# Altium PCB DRAM_TEMP_AD.pcbdoc (part 2 of 2)
Units mil, origin at the board's own origin, x right, y up, seen from the top; angles counter-clockwise.
Board outline 1637.1 x 1239.26 mil, 2 copper layers (Top Layer, Bottom Layer); 88 components, 167 nets, 455 pads, 173 vias.
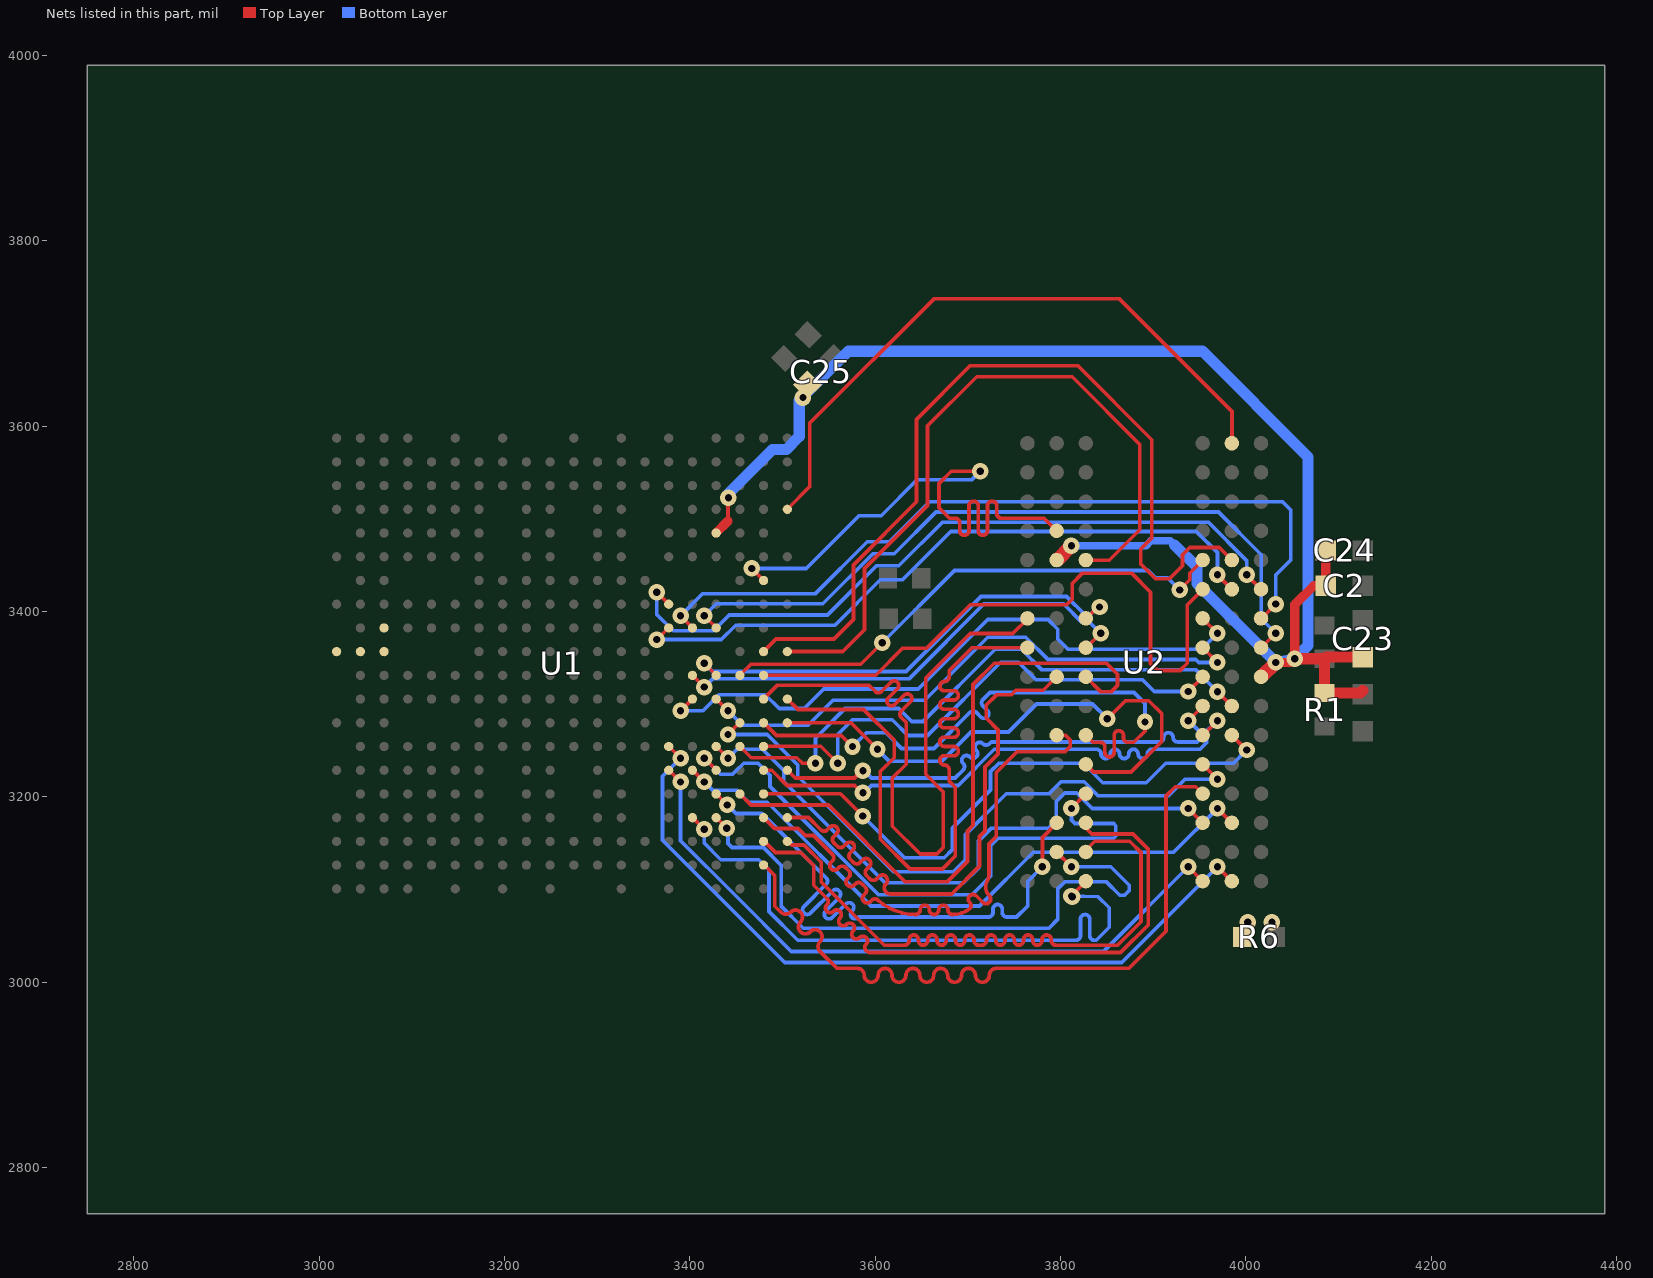
[diagram p2: the nets of this part, all layers, seen from the top]

## Via types
v1: diameter 17.72, hole 7.87, Top Layer to Bottom Layer, 140 vias
v2: diameter 17.7, hole 7.9, Top Layer to Bottom Layer, 29 vias
v3: diameter 18, hole 8, Top Layer to Bottom Layer, 4 vias

## Nets (pads, with @x,y where several pads share a name; then routed paths per layer and width w, separated by ;. In a path a pad name is that pad's centre, name@x,y a point inside that pad or via, vN(x,y) a via of type N, cw(c..) or ccw(c..) an arc to the next point about the centre after c; other vN are vias at no path point) (continued)
SA15: U1.Y11 U2.M7 | length 786
  Top Layer w4: U1.Y11@3505.22,3356.86 3565.14,3356.86 3588.54,3380.26 3588.54,3446.26 3656.54,3514.26 3656.54,3600.26 3709.54,3653.26 3812.54,3653.26 3885.54,3580.26 3885.54,3488.26 3852.52,3455.24 U2.M7@3827.54,3455.24
SBA0: U1.W11 U2.M2 | length 937.4
  Top Layer w4: U1.W11@3479.63,3356.86 3493.03,3370.26 3555.54,3370.26 3576.54,3391.26 3576.54,3450.26 3644.54,3518.26 3644.54,3607.26 3702.54,3665.26 3818.54,3665.26 3898.54,3585.26 3898.54,3479.26 3886.54,3467.26 3886.54,3451.26 3902.54,3435.26 3917.54,3435.26 3931.54,3449.26 3931.54,3461.26 3939.4,3469.11 3971.15,3469.11 U2.M2@3985.02,3455.24
SBA1: U1.W14 U2.N8 | length 647.9
  Top Layer w4: v1(3466.84,3446.42) U1.W14@3479.63,3433.63 ; v1(3713.54,3551.26) 3682.06,3551.26 3668.8,3538 3668.8,3512 3680.2,3500.6 3686.22,3500.6 cw(c3686.22,3495.6) 3691.22,3495.6 3691.22,3487.2 ccw(c3696.22,3487.2) 3696.22,3482.2 ccw(c3696.22,3487.2) 3701.22,3487.2 3701.22,3514 cw(c3706.22,3514) 3706.22,3519 cw(c3706.22,3514) 3711.22,3514 3711.22,3487.2 ccw(c3716.22,3487.2) 3716.22,3482.2 ccw(c3716.22,3487.2) 3721.22,3487.2 3721.22,3514 cw(c3726.22,3514) 3726.22,3519 cw(c3726.22,3514) 3731.22,3514 3731.22,3505.6 ccw(c3736.22,3505.6) 3736.22,3500.6 3782.17,3500.6 U2.N8@3796.04,3486.73
  Bottom Layer w4: v1(3466.84,3446.42) 3525.71,3446.42 3582.54,3503.26 3606.54,3503.26 3645.54,3542.26 3704.54,3542.26 v1(3713.54,3551.26)
SBA2: U1.V10 U2.M3 | length 572.3
  Top Layer w4: U1.V10@3454.04,3331.26 3465.95,3343.16 3584.45,3343.16 v1(3607.54,3366.26) ; v1(3928.54,3423.26) 3939.54,3434.26 3939.54,3441.26 U2.M3@3953.52,3455.24
  Bottom Layer w4: v1(3607.54,3366.26) 3685.54,3444.26 3894.54,3444.26 3902.54,3436.26 3915.54,3436.26 v1(3928.54,3423.26)
SCAS: U1.T9 U2.K3 | length 699.4
  Top Layer w4: v1(3390.07,3292.87) U1.T9@3402.86,3305.67 ; U2.K3@3953.52,3392.24 v1(3969.27,3376.49)
  Bottom Layer w4: v1(3390.07,3292.87) 3414.16,3292.87 3431.54,3310.26 3481.54,3310.26 3496.54,3295.26 3523.54,3295.26 3544.54,3316.26 3646.54,3316.26 3721.54,3391.26 3774.04,3391.26 3774.14,3391.35 3786.45,3391.35 3796.93,3380.87 3796.93,3370.33 3808.01,3359.26 3952.04,3359.26 v1(3969.27,3376.49)
SCKE0: U1.W9 U2.K9 | length 771.4
  Top Layer w4: U1.W9@3479.63,3305.67 3494.22,3320.26 3593.54,3320.26 3599.99,3313.81 ccw(c3603.52,3317.35) 3607.06,3313.81 3616.99,3323.74 cw(c3620.52,3320.21) 3624.06,3323.74 cw(c3620.52,3320.21) 3624.06,3316.67 3614.13,3306.74 ccw(c3617.67,3303.21) 3614.13,3299.67 ccw(c3617.67,3303.21) 3621.2,3299.67 3631.13,3309.6 cw(c3634.67,3306.06) 3638.2,3309.6 cw(c3634.67,3306.06) 3638.2,3302.53 3628.27,3292.6 ccw(c3631.81,3289.06) 3628.27,3285.53 3633.54,3280.26 3633.54,3235.26 3618.54,3220.26 3618.54,3168.26 3648.54,3138.26 3666.54,3138.26 3673.54,3145.26 3673.54,3205.26 3654.54,3224.26 3654.54,3328.26 3702.54,3376.26 3748.57,3376.26 U2.K9@3764.55,3392.24
SCKE1: U1.Y9 U2.J9 | length 781.8
  Top Layer w4: U1.Y9@3505.22,3305.67 3516.63,3294.26 3587.54,3294.26 3620.54,3261.26 3620.54,3242.26 3605.54,3227.26 3605.54,3154.26 3637.54,3122.26 3672.54,3122.26 3686.54,3136.26 3686.54,3210.26 3679.8,3217 3679.8,3229.39 ccw(c3674.8,3229.39) 3674.8,3234.39 cw(c3674.8,3239.39) 3669.8,3239.39 cw(c3674.8,3239.39) 3674.8,3244.39 3684.8,3244.39 ccw(c3684.8,3249.39) 3689.8,3249.39 ccw(c3684.8,3249.39) 3684.8,3254.39 3674.8,3254.39 cw(c3674.8,3259.39) 3669.8,3259.39 cw(c3674.8,3259.39) 3674.8,3264.39 3684.8,3264.39 ccw(c3684.8,3269.39) 3689.8,3269.39 ccw(c3684.8,3269.39) 3684.8,3274.39 3674.8,3274.39 cw(c3674.8,3279.39) 3669.8,3279.39 cw(c3674.8,3279.39) 3674.8,3284.39 3684.8,3284.39 ccw(c3684.8,3289.39) 3689.8,3289.39 ccw(c3684.8,3289.39) 3684.8,3294.39 3674.8,3294.39 cw(c3674.8,3299.39) 3669.8,3299.39 cw(c3674.8,3299.39) 3674.8,3304.39 3684.8,3304.39 ccw(c3684.8,3309.39) 3689.8,3309.39 ccw(c3684.8,3309.39) 3684.8,3314.39 3674.8,3314.39 cw(c3674.8,3319.39) 3669.8,3319.39 cw(c3674.8,3319.39) 3674.8,3324.39 ccw(c3674.8,3329.39) 3679.8,3329.39 3679.8,3336 3704.8,3361 3724.78,3361 3725.03,3360.75 U2.J9@3764.55,3360.75
SCKN: U1.U10 U2.K7 | length 997.5
  Top Layer w4: v1(3415.66,3344.05) U1.U10@3428.45,3331.26 ; U2.K7@3827.54,3392.24 3839.1,3403.8 3841.1,3403.8 v1(3842.1,3404.8)
  Mid-Layer 1 w4: v1(3842.1,3404.8) 3851.1,3395.8 3886.1,3395.8 3904.1,3377.8 3904.1,3309.8 3915.1,3298.8 3915.1,3119.8 3936.1,3098.8 4007.1,3098.8 4018.1,3087.8 4018.1,3079.8 4028.1,3069.8 v2(4028.1,3064.8)
  Bottom Layer w4: v1@3415.76,3344.05 v1(3415.66,3344.05) 3424.56,3335.26 3633.23,3335.26 3714.23,3416.26 3806.54,3416.26 3826.56,3396.24 3831.54,3396.24 3839.1,3403.8 v1@3847.48,3403.8
SCKP: R6.1 U1.T10 U2.J7 | length 982
  Top Layer w4: U1.T10@3402.86,3331.26 v1(3415.66,3318.46) ; U2.J7@3827.54,3360.75 v1(3843.29,3376.49)
  Mid-Layer 1 w4: v1(3843.29,3376.49) 3854.59,3387.8 3882.1,3387.8 3896.1,3373.8 3896.1,3305.8 3907.1,3294.8 3907.1,3114.8 3931.1,3090.8 4002.1,3090.8 4009.1,3083.8 4009.1,3078.8 4002.1,3071.8 v2(4002.1,3064.8)
  Bottom Layer w4: v1@3415.76,3318.46 v1(3415.66,3318.46) 3424.56,3327.26 3636.54,3327.26 3717.54,3408.26 3803.23,3408.26 3823.24,3388.24 3831.54,3388.24 v1(3843.29,3376.49)
SCS0: U1.R12 U2.L2 | length 726.9
  Top Layer w4: v1(3364.48,3369.65) U1.R12@3377.27,3382.45 ; v1(3969.27,3439.48) U2.L2@3985.02,3423.74
  Bottom Layer w4: v1(3364.48,3369.65) 3433.94,3369.65 3449.54,3385.26 3556.54,3385.26 3605.54,3434.26 3629.54,3434.26 3681.54,3486.26 3946.54,3486.26 3969.27,3463.52 v1(3969.27,3439.48)
SCS1: U1.R13 U2.L1 | length 789
  Top Layer w4: v1(3364.48,3420.83) U1.R13@3377.27,3408.04 ; v1(4000.76,3439.49) U2.L1@4016.51,3423.74
  Bottom Layer w4: v1(3364.48,3420.83) 3364.48,3396.83 3382.05,3379.26 3425.54,3379.26 3442.54,3396.26 3548.54,3396.26 3601.54,3449.26 3625.54,3449.26 3672.54,3496.26 3959.54,3496.26 4000.76,3455.03 v1(4000.76,3439.49)
SDC1_CLK: 
SDC1_CMD: 
SDC1_D0: 
SDC1_D1: 
SDC1_D2: 
SDC1_D3: 
SDQ0: U1.W7 U2.H3 | length 578.3
  Top Layer w4: U1.W7@3479.63,3254.49 3541.31,3254.49 v1(3559.54,3236.26) ; v1(3937.64,3313.63) U2.H3@3953.39,3329.38
  Bottom Layer w4: v1(3559.54,3236.26) 3559.54,3267.26 3575.54,3283.26 3618.54,3283.26 3635.54,3266.26 3656.54,3266.26 3735.54,3345.26 3754.54,3345.26 3773.54,3326.26 3888.54,3326.26 3901.17,3313.63 v1(3937.64,3313.63)
SDQ1: U1.V7 U2.G2 | length 642.4
  Top Layer w4: U1.V7@3454.04,3254.49 3466.27,3242.26 3515.54,3242.26 3521.54,3236.26 v1(3535.54,3236.26) ; v1(3969.27,3313.51) U2.G2@3985.02,3297.76
  Bottom Layer w4: v1(3535.54,3236.26) 3535.54,3263.26 3567.54,3295.26 3625.54,3295.26 3639.54,3281.26 3651.54,3281.26 3729.54,3359.26 3757.54,3359.26 3779.54,3337.26 3945.52,3337.26 v1(3969.27,3313.51)
SDQ2: U1.W8 U2.F7 | length 635.8
  Top Layer w4: U1.W8@3479.63,3280.08 3493.45,3266.26 3563.54,3266.26 v1(3575.54,3254.26) ; U2.F7@3827.3,3266.5 3835,3258.8 3842.85,3258.8 cw(c3842.85,3253.8) 3847.85,3253.8 3847.85,3248 ccw(c3852.85,3248) 3852.85,3243 ccw(c3852.85,3248) 3857.85,3248 3857.85,3266.32 cw(c3862.85,3266.32) 3862.85,3271.32 cw(c3862.85,3266.32) 3867.85,3266.32 3867.85,3263.8 ccw(c3872.85,3263.8) 3872.85,3258.8 3879.1,3258.8 3891.1,3270.8 v1(3891.1,3280.8)
  Bottom Layer w4: v1(3575.54,3254.26) 3590.54,3269.26 3611.54,3269.26 3628.54,3252.26 3663.54,3252.26 3702.17,3290.89 cw(c3705.71,3287.35) 3709.24,3290.89 3713.97,3286.16 ccw(c3717.51,3289.7) 3721.04,3286.16 ccw(c3717.51,3289.7) 3721.04,3293.24 3716.32,3297.96 cw(c3719.85,3301.5) 3716.32,3305.03 3723.9,3312.62 3879.29,3312.62 3891.1,3300.8 v1(3891.1,3280.8)
  other v1: 3575.54,3254.26 3575.54,3254.26
SDQ3: U1.V8 U2.E3 | length 706.3
  Top Layer w4: v1(3441.25,3267.28) U1.V8@3454.04,3280.08 ; U2.E3@3953.52,3234.76 v1(3969.27,3219.01)
  Bottom Layer w4: v1(3441.25,3267.28) 3483.52,3267.28 3516.54,3234.26 3516.54,3222.26 3619.54,3119.26 3684.54,3119.26 3697.54,3132.26 3697.54,3159.26 3741.54,3203.26 3787.54,3203.26 3800.54,3216.26 3825.54,3216.26 3840.54,3201.26 3916.54,3201.26 3934.29,3219.01 v1(3969.27,3219.01)
SDQ4: U1.W4 U2.F8 | length 636.3
  Top Layer w4: U1.W4@3479.63,3177.72 3491.54,3165.81 3516.99,3165.81 3524.54,3158.26 3533.54,3158.26 3553.87,3137.93 cw(c3550.33,3134.39) 3553.87,3130.86 3552.44,3129.43 ccw(c3555.98,3125.9) 3552.44,3122.36 ccw(c3555.98,3125.9) 3559.51,3122.36 3560.94,3123.79 cw(c3564.47,3120.25) 3568.01,3123.79 3571.55,3120.25 cw(c3568.01,3116.72) 3571.55,3113.18 3570.12,3111.75 ccw(c3573.65,3108.22) 3570.12,3104.68 ccw(c3573.65,3108.22) 3577.19,3104.68 3578.62,3106.11 cw(c3582.15,3102.57) 3585.69,3106.11 3589.22,3102.57 cw(c3585.69,3099.04) 3589.22,3095.5 3587.8,3094.08 ccw(c3591.33,3090.54) 3587.8,3087 ccw(c3591.33,3090.54) 3594.87,3087 3596.29,3088.43 cw(c3599.83,3084.9) 3603.37,3088.43 ccw(c3643.51,3132.92) 3643.51,3073 ccw(c3643.51,3078) 3648.51,3078 cw(c3653.51,3078) 3653.51,3083 cw(c3653.51,3078) 3658.51,3078 ccw(c3663.51,3078) 3663.51,3073 ccw(c3663.51,3078) 3668.51,3078 cw(c3673.51,3078) 3673.51,3083 cw(c3673.51,3078) 3678.51,3078 ccw(c3683.51,3078) 3683.51,3073 ccw(c3683.51,3103.75) 3701.93,3079.13 ccw(c3698.39,3082.66) 3701.93,3086.2 cw(c3705.46,3089.74) 3701.93,3093.27 cw(c3705.46,3089.74) 3709,3093.27 3716.07,3086.2 ccw(c3719.61,3089.74) 3723.14,3086.2 ccw(c3719.61,3089.74) 3723.14,3093.27 cw(c3732.59,3102.72) 3720.8,3109 ccw(c3705.79,3117) 3722.8,3117 3722.8,3149.52 3730.54,3157.26 3730.54,3226.26 3752.92,3248.63 3804.92,3248.63 3810.54,3254.26 3810.54,3261.26 3805.3,3266.5 U2.F8@3795.8,3266.5
SDQ5: U1.Y4 U2.H8 | length 604.4
  Top Layer w4: U1.Y4@3505.22,3177.72 3528.08,3177.72 3541.35,3164.45 ccw(c3544.88,3167.99) 3548.42,3164.45 3551.35,3167.38 cw(c3554.88,3163.85) 3558.42,3167.38 cw(c3554.88,3163.85) 3558.42,3160.31 3555.49,3157.38 ccw(c3559.03,3153.85) 3555.49,3150.31 3559.03,3146.77 ccw(c3562.56,3150.31) 3566.1,3146.77 3569.03,3149.7 cw(c3572.56,3146.17) 3576.1,3149.7 cw(c3572.56,3146.17) 3576.1,3142.63 3573.17,3139.7 ccw(c3576.7,3136.17) 3573.17,3132.63 3576.7,3129.1 ccw(c3580.24,3132.63) 3583.77,3129.1 3586.7,3132.03 cw(c3590.24,3128.49) 3593.77,3132.03 cw(c3590.24,3128.49) 3593.77,3124.95 3590.85,3122.03 ccw(c3594.38,3118.49) 3590.85,3114.95 3594.38,3111.42 ccw(c3597.92,3114.95) 3601.45,3111.42 3604.38,3114.35 cw(c3607.92,3110.81) 3611.45,3114.35 cw(c3607.09,3109.98) 3611.8,3106 ccw(c3614.97,3101.83) 3609.8,3101 ccw(c3616.54,3102.09) 3616.54,3095.26 3682.54,3095.26 3712.54,3125.26 3712.54,3157.26 3718.54,3163.26 3718.54,3232.26 3732.54,3246.26 3732.54,3272.26 3719.8,3285 3719.8,3299 3730.8,3310 3746.8,3310 3751.8,3315 3781.3,3315 U2.H8@3795.8,3329.5
SDQ6: U1.V5 U2.H7 | length 713.7
  Top Layer w4: U1.V5@3454.04,3203.31 3466.09,3191.26 3549.54,3191.26 3632.54,3108.26 3677.54,3108.26 3699.54,3130.26 3699.54,3163.26 3705.54,3169.26 3705.54,3321.26 3728.39,3344.11 3849.69,3344.11 3861.54,3332.26 3861.54,3320.26 3854.54,3313.26 3843.53,3313.26 U2.H7@3827.3,3329.5
SDQ7: U1.W5 U2.F2 | length 662.7
  Top Layer w4: U1.W5@3479.63,3203.31 3562.49,3203.31 v1(3586.54,3179.26) ; U2.F2@3985.02,3266.26 v1(4000.77,3250.51)
  Bottom Layer w4: v1(3586.54,3179.26) 3631.54,3134.26 3674.54,3134.26 3683.54,3143.26 3683.54,3166.26 3724.54,3207.26 3724.54,3227.26 3733.54,3236.26 3824.54,3236.26 3845.54,3215.26 3892.54,3215.26 3913.54,3236.26 3986.52,3236.26 v1(4000.77,3250.51)
SDQ8: U1.U4 U2.B8 | length 677
  Top Layer w4: U1.U4@3428.45,3177.72 3439.8,3166.37 v1(3439.8,3166) ; U2.B8@3795.8,3140.5 v1(3811.79,3124.53)
  Bottom Layer w4: v1(3439.8,3166) 3441.25,3164.55 3441.25,3149.55 3445.54,3145.26 3479.54,3145.26 3498.54,3126.26 3498.54,3082.26 3522.54,3058.26 3787.54,3058.26 3796.86,3067.58 3796.86,3100.58 3804.54,3108.26 3849.54,3108.26 3864,3093.8 3869.08,3093.8 3874.1,3098.82 3874.1,3104.69 3854.27,3124.53 v1(3811.79,3124.53)
SDQ9: U1.U7 U2.C3 | length 683.9
  Top Layer w4: U1.U7@3428.45,3254.49 v1(3441.25,3241.69) ; v1(3937.77,3187.51) U2.C3@3953.52,3171.77
  Bottom Layer w4: v1(3441.25,3241.69) 3450.81,3251.26 3478.54,3251.26 3501.54,3228.26 3501.54,3216.26 3610.54,3107.26 3695.54,3107.26 3711.54,3123.26 3711.54,3152.26 3725.54,3166.26 3787.54,3166.26 3795.54,3174.26 3795.54,3195.26 3804.54,3204.26 3817.54,3204.26 3834.28,3187.51 v1(3937.77,3187.51)
SDQ10: U1.U5 U2.C8 | length 660.2
  Top Layer w4: U1.U5@3428.45,3203.31 v1(3440.45,3191.31) ; v1@3780.54,3125.26 3780.54,3156.27 U2.C8@3796.04,3171.77
  Bottom Layer w4: v1(3440.45,3191.31) 3449.76,3182 3477.8,3182 3547.12,3112.68 cw(c3543.58,3109.15) 3547.12,3105.61 3523.19,3081.68 ccw(c3526.72,3078.15) 3523.19,3074.61 ccw(c3526.72,3078.15) 3530.26,3074.61 3554.19,3098.54 cw(c3557.72,3095.01) 3561.26,3098.54 cw(c3557.72,3095.01) 3561.26,3091.47 3546.65,3076.86 ccw(c3550.19,3073.33) 3546.65,3069.79 ccw(c3550.19,3073.33) 3553.72,3069.79 3568.33,3084.4 cw(c3571.87,3080.86) 3575.4,3084.4 cw(c3571.87,3080.86) 3575.4,3077.33 3574.94,3076.86 ccw(c3578.47,3073.33) 3574.94,3069.79 ccw(c3578.47,3073.33) 3582.01,3069.79 3582.47,3070.26 3722.14,3070.26 ccw(c3722.14,3075.26) 3727.14,3075.26 3727.14,3078.83 cw(c3732.14,3078.83) 3732.14,3083.83 cw(c3732.14,3078.83) 3737.14,3078.83 3737.14,3075.26 ccw(c3742.14,3075.26) 3742.14,3070.26 3752.54,3070.26 3764.54,3082.26 3764.54,3108.78 v1(3780.29,3124.53)
  other v1: 3440.45,3191.31 3440.45,3191.31
SDQ11: U1.T6 U2.C2 | length 693
  Top Layer w4: U1.T6@3402.86,3228.9 v1(3415.66,3216.1) ; v1(3969.27,3187.51) U2.C2@3985.02,3171.77
  Bottom Layer w4: v1(3415.66,3216.1) 3424.51,3207.26 3450.54,3207.26 3463.54,3194.26 3483.54,3194.26 3595.54,3082.26 3712.54,3082.26 3770.54,3140.26 3922.01,3140.26 v1(3969.27,3187.51)
SDQ12: U1.U6 U2.D7 | length 682
  Top Layer w4: v1(3415.66,3241.69) U1.U6@3428.45,3228.9 ; v1(3811.79,3187.52) U2.D7@3827.3,3203.5
  Bottom Layer w4: v1(3415.66,3241.69) 3433.09,3224.26 3446.18,3224.26 3458.18,3236.26 3473.54,3236.26 3486.54,3223.26 3486.54,3211.26 3603.54,3094.26 3704.54,3094.26 3724.54,3114.26 3724.54,3147.26 3732.54,3155.26 3857.2,3155.26 3859.54,3157.6 3859.54,3168.91 3857.2,3171.26 3815.54,3171.26 3811.79,3175 v1(3811.79,3187.52)
SDQ13: U1.R7 U2.A2 | length 833
  Top Layer w4: U1.R7@3377.27,3254.49 v1(3390.07,3241.69) ; v1(3969.27,3124.52) U2.A2@3985.02,3108.78
  Bottom Layer w4: v1(3390.07,3241.69) 3370.68,3222.31 3370.68,3153.12 3502.54,3021.26 3866,3021.26 v1(3969.27,3124.52)
SDQ14: U1.T4 U2.A7 | length 681.3
  Top Layer w4: U1.T4@3402.86,3177.72 v1(3415.66,3164.92) ; v1(3811.79,3093.03) U2.A7@3827.3,3109
  Bottom Layer w4: v1(3415.66,3164.92) 3415.66,3150.14 3433.54,3132.26 3474.54,3132.26 3485.54,3121.26 3485.54,3076.26 3516.54,3045.26 3816.53,3045.26 ccw(c3816.53,3050.26) 3821.53,3050.26 3821.53,3068 cw(c3826.53,3068) 3826.53,3073 cw(c3826.53,3068) 3831.53,3068 3831.53,3050.26 ccw(c3836.53,3050.26) 3836.53,3045.26 3838.54,3045.26 3852.54,3059.26 3852.54,3080.26 3840.54,3092.26 v1(3811.79,3093.03)
  other v1: 3812.54,3092.26
SDQ15: U1.R6 U2.A3 | length 738.7
  Top Layer w4: U1.R6@3377.27,3228.9 v1(3390.07,3216.1) ; v1(3937.77,3124.53) U2.A3@3953.52,3108.78
  Bottom Layer w4: v1(3390.07,3216.1) 3390.07,3152.73 3448.54,3094.26 3509.54,3033.26 3846.5,3033.26 v1(3937.77,3124.53)
SDQM0: U1.Y8 U2.E7 | length 596.3
  Top Layer w4: U1.Y8@3505.22,3280.08 3573.72,3280.08 v1(3602.54,3251.26) ; U2.E7@3827.3,3235 3835.5,3226.8 3876.1,3226.8 3909.1,3259.8 3909.1,3289.8 3895.1,3303.8 3870.08,3303.8 v1(3850.54,3284.26)
  Bottom Layer w4: v1(3602.54,3251.26) 3615.54,3238.26 3671.54,3238.26 3703.28,3270 3743.8,3270 3774.06,3300.26 3834.54,3300.26 v1(3850.54,3284.26)
SDQM1: U1.W2 U2.D3 | length 829.4
  Top Layer w4: U1.W2@3479.45,3127.35 3491.8,3115 3491.8,3082 3498.16,3075.64 ccw(c3503.47,3080.94) 3508.77,3075.64 cw(c3514.07,3070.33) 3519.38,3075.64 cw(c3514.07,3070.33) 3519.38,3065.03 ccw(c3524.68,3059.73) 3519.38,3054.42 ccw(c3524.68,3059.73) 3529.98,3054.42 cw(c3535.29,3049.12) 3540.59,3054.42 cw(c3535.29,3049.12) 3540.59,3043.82 ccw(c3545.89,3038.51) 3540.59,3033.21 3558.8,3015 3580.69,3015 cw(c3580.69,3007.5) 3588.19,3007.5 ccw(c3595.69,3007.5) 3595.69,3000 ccw(c3595.69,3007.5) 3603.19,3007.5 cw(c3610.69,3007.5) 3610.69,3015 cw(c3610.69,3007.5) 3618.19,3007.5 ccw(c3625.69,3007.5) 3625.69,3000 ccw(c3625.69,3007.5) 3633.19,3007.5 cw(c3640.69,3007.5) 3640.69,3015 cw(c3640.69,3007.5) 3648.19,3007.5 ccw(c3655.69,3007.5) 3655.69,3000 ccw(c3655.69,3007.5) 3663.19,3007.5 cw(c3670.69,3007.5) 3670.69,3015 cw(c3670.69,3007.5) 3678.19,3007.5 ccw(c3685.69,3007.5) 3685.69,3000 ccw(c3685.69,3007.5) 3693.19,3007.5 cw(c3700.69,3007.5) 3700.69,3015 cw(c3700.69,3007.5) 3708.19,3007.5 ccw(c3715.69,3007.5) 3715.69,3000 ccw(c3715.69,3007.5) 3723.19,3007.5 cw(c3730.69,3007.5) 3730.69,3015 3873.8,3015 3913.8,3055 3913.8,3201 3923.8,3211 3945.8,3211 U2.D3@3953.3,3203.5
SDQS0N: U1.Y6 U2.G3 | length 553.7
  Top Layer w4: U1.Y6@3505.22,3228.9 3513.86,3220.26 3577.63,3220.26 3585.48,3228.1 v1(3586.83,3228.1) ; v1(3937.77,3282.01) U2.G3@3953.52,3297.76
  Bottom Layer w4: v1(3586.83,3228.1) 3588.19,3228.1 3596.04,3220.26 3686.23,3220.26 3694.99,3229.02 ccw(c3691.46,3232.56) 3694.99,3236.09 cw(c3698.53,3239.63) 3694.99,3243.16 cw(c3698.53,3239.63) 3702.06,3243.16 ccw(c3705.6,3246.7) 3709.13,3243.16 ccw(c3705.6,3246.7) 3709.13,3250.23 cw(c3712.67,3253.77) 3709.13,3257.31 cw(c3712.67,3253.77) 3716.2,3257.31 ccw(c3719.74,3260.84) 3723.28,3257.31 3725.23,3259.26 3906.4,3259.26 ccw(c3906.4,3264.26) 3911.4,3264.26 cw(c3916.4,3264.26) 3916.4,3269.26 cw(c3916.4,3264.26) 3921.4,3264.26 ccw(c3926.4,3264.26) 3926.4,3259.26 3947.18,3259.26 3949.52,3261.6 3949.52,3270.95 3938.46,3282.01 v1(3937.77,3282.01)
  other v1: 3937.77,3282.01
SDQS0P: U1.W6 U2.F3 | length 597.2
  Top Layer w4: U1.W6@3479.72,3228.77 3488.47,3228.77 3504.98,3212.26 3577.63,3212.26 v1(3586.83,3204.41) v1@3585.48,3204.41 ; U2.F3@3953.52,3266.26 v1(3969.27,3282)
  Bottom Layer w4: v1(3586.83,3204.41) 3588.19,3204.41 3596.04,3212.26 3689.54,3212.26 3728.54,3251.26 3838.72,3251.26 cw(c3838.72,3246.26) 3843.72,3246.26 ccw(c3848.72,3246.26) 3848.72,3241.26 ccw(c3848.72,3246.26) 3853.72,3246.26 cw(c3858.72,3246.26) 3858.72,3251.26 cw(c3858.72,3246.26) 3863.72,3246.26 ccw(c3868.72,3246.26) 3868.72,3241.26 ccw(c3868.72,3246.26) 3873.72,3246.26 cw(c3878.72,3246.26) 3878.72,3251.26 cw(c3878.72,3246.26) 3883.72,3246.26 ccw(c3888.72,3246.26) 3888.72,3241.26 ccw(c3888.72,3246.26) 3893.72,3246.26 cw(c3898.72,3246.26) 3898.72,3251.26 3950.49,3251.26 3957.52,3258.29 3957.52,3270.95 v1(3969.27,3282) v1@3968.58,3282
  other v1: 3586.83,3204.41
SDQS1N: U1.Y3 U2.B7 | length 703.9
  Top Layer w4: U1.Y3@3505.04,3152.94 3509.98,3148 3523.11,3148 3541.8,3129.31 3541.8,3108 3609.8,3040 3631.66,3040 ccw(c3631.66,3045) 3636.66,3045 3636.66,3046 cw(c3641.66,3046) 3641.66,3051 cw(c3641.66,3046) 3646.66,3046 3646.66,3045 ccw(c3651.66,3045) 3651.66,3040 ccw(c3651.66,3045) 3656.66,3045 3656.66,3046 cw(c3661.66,3046) 3661.66,3051 cw(c3661.66,3046) 3666.66,3046 3666.66,3045 ccw(c3671.66,3045) 3671.66,3040 ccw(c3671.66,3045) 3676.66,3045 3676.66,3046 cw(c3681.66,3046) 3681.66,3051 cw(c3681.66,3046) 3686.66,3046 3686.66,3045 ccw(c3691.66,3045) 3691.66,3040 ccw(c3691.66,3045) 3696.66,3045 3696.66,3046 cw(c3701.66,3046) 3701.66,3051 cw(c3701.66,3046) 3706.66,3046 3706.66,3045 ccw(c3711.66,3045) 3711.66,3040 3715.03,3040 ccw(c3715.03,3045) 3720.03,3045 3720.03,3046 cw(c3725.03,3046) 3725.03,3051 cw(c3725.03,3046) 3730.03,3046 3730.03,3045 ccw(c3735.03,3045) 3735.03,3040 ccw(c3735.03,3045) 3740.03,3045 3740.03,3046 cw(c3745.03,3046) 3745.03,3051 cw(c3745.03,3046) 3750.03,3046 3750.03,3045 ccw(c3755.03,3045) 3755.03,3040 ccw(c3755.03,3045) 3760.03,3045 3760.03,3046 cw(c3765.03,3046) 3765.03,3051 cw(c3765.03,3046) 3770.03,3046 3770.03,3045 ccw(c3775.03,3045) 3775.03,3040 ccw(c3775.03,3045) 3780.03,3045 3780.03,3046 cw(c3785.03,3046) 3785.03,3051 cw(c3785.03,3046) 3790.03,3046 3790.03,3045 ccw(c3795.03,3045) 3795.03,3040 3861.49,3040 3886.8,3065.31 3886.8,3140 3874.8,3152 3836.8,3152 3827.3,3142.5 U2.B7@3827.3,3140.5
SDQS1P: U1.W3 U2.C7 | length 698.1
  Top Layer w4: U1.W3@3479.45,3152.94 3492.39,3140 3519.8,3140 3533.8,3126 3533.8,3104.69 3547.9,3090.59 cw(c3544.36,3087.05) 3547.9,3083.52 ccw(c3551.43,3079.98) 3547.9,3076.45 ccw(c3551.43,3079.98) 3554.97,3076.45 cw(c3558.5,3072.91) 3562.04,3076.45 cw(c3558.5,3072.91) 3562.04,3069.38 ccw(c3565.57,3065.84) 3562.04,3062.31 ccw(c3565.57,3065.84) 3569.11,3062.31 cw(c3572.64,3058.77) 3576.18,3062.31 cw(c3572.64,3058.77) 3576.18,3055.24 ccw(c3579.72,3051.7) 3576.18,3048.16 ccw(c3579.72,3051.7) 3583.25,3048.16 cw(c3586.79,3044.63) 3590.32,3048.16 cw(c3586.79,3044.63) 3590.32,3041.09 ccw(c3593.86,3037.56) 3590.32,3034.02 ccw(c3595.24,3038.94) 3594.8,3032 3864.8,3032 3894.8,3062 3894.8,3143.31 3878.11,3160 3833.8,3160 3827.3,3166.5 U2.C7@3827.3,3172
SODT0: U1.T12 U2.K1 | length 861.5
  Top Layer w4: v1(3390.07,3395.24) U1.T12@3402.86,3382.45 ; U2.K1@4016.51,3392.24 v1(4032.26,3407.98)
  Bottom Layer w4: v1(3390.07,3395.24) 3414.08,3419.26 3535.54,3419.26 3591.54,3475.26 3615.54,3475.26 3658.54,3518.26 4039.54,3518.26 4048.54,3509.26 4048.54,3455.74 4032.26,3439.46 v1(4032.26,3407.98)
SODT1: U1.U12 U2.J1 | length 798
  Top Layer w4: v1(3415.66,3395.24) U1.U12@3428.45,3382.45 ; U2.J1@4016.51,3360.75 v1(4032.26,3376.49)
  Bottom Layer w4: v1(3415.66,3395.24) 3428.67,3408.26 3543.54,3408.26 3597.54,3462.26 3620.54,3462.26 3665.54,3507.26 3970.54,3507.26 4016.54,3461.26 4016.54,3392.21 v1(4032.26,3376.49)
SRAS: U1.U9 U2.J3 | length 625.5
  Top Layer w4: U1.U9@3428.45,3305.67 v1(3441.25,3292.87) ; U2.J3@3953.52,3360.75 v1(3969.27,3345)
  Bottom Layer w4: v1(3441.25,3292.87) 3456.86,3277.26 3527.54,3277.26 3554.54,3304.26 3653.54,3304.26 3721.54,3372.26 3762.54,3372.26 3786.54,3348.26 3945.83,3348.26 3949.09,3345 v1(3969.27,3345)
SRST: U1.Y17 U2.T2 | length 698.8
  Top Layer w4: U1.Y17@3505.22,3510.4 3529.54,3534.72 3529.54,3603.26 3663.54,3737.26 3863.54,3737.26 3985.02,3615.78 U2.T2@3985.02,3581.22
SVREF: C2.2 C23.2 C24.2 C25.2 R1.1 U1.U16 U2.H1 U2.M8 | length 1703.8
  Top Layer w4.5: v1@3439.64,3522.33 3441.16,3523.86 3441.25,3523.94 3441.25,3523.69 3441.25,3497.6
  Top Layer w10: U1.U16@3428.45,3484.81 3441.25,3497.6 ; v1(4032.26,3344.99) 4048.72,3344.99 v3(4052.73,3349) 4052.73,3407.42 4073.1,3427.8 C2.2@4086.1,3427.8 C24.2@4086.1,3465.8
  Top Layer w12: v1@3441.16,3523.86 3441.25,3523.69 v1(3441.7,3522.8) v1@3441.7,3523.37 ; v1@3441.96,3523.05 v1@3441.7,3523.37 ; v3(4052.73,3349) 4084.8,3349 ; 4126.1,3314.8 4123.31,3312 R1.1@4084.8,3312 4084.8,3348.99 ; C23.2@4126.1,3350.79 4086.6,3350.8 4084.8,3349 ; v1@3441.7,3523.37 3441.7,3523.48 3441.25,3523.94 v1@3441.7,3523.37
  Top Layer w15: U2.M8@3796.04,3455.24 v1(3811.79,3470.98) ; U2.H1@4016.51,3329.25 v1(4032.26,3344.99)
  Bottom Layer w8: v1(3811.79,3470.98) 3892.29,3470.98 3897.56,3476.26 3918.64,3476.26 3923.1,3471.8
  Bottom Layer w12: v1@3441.25,3525.66 3442.1,3524.8 3442.1,3523.2 v1(3441.7,3522.8) ; v1@3441.25,3526.94 3489.1,3574.8 3504.1,3574.8 3518.1,3588.8 3518.1,3627.8 3571.1,3680.8 3953.1,3680.8 4067.1,3566.8 4067.1,3363.38 v3(4052.73,3349) v1(4032.26,3344.99) 3947.1,3430.15 3947.1,3447.8 3923.1,3471.8
  other v2: 3522.1,3630.8
SWE: U1.W10 U2.L3 | length 691.1
  Top Layer w4: U1.W10@3479.63,3331.26 3600.54,3331.26 3629.54,3360.26 3655.54,3360.26 3702.54,3407.26 3806.54,3407.26 3812.54,3413.26 3812.54,3430.26 3823.65,3441.36 3876.44,3441.36 3897.1,3420.69 3897.1,3343.69 3904.54,3336.26 3928.81,3336.26 3936.68,3344.13 3936.68,3406.9 U2.L3@3953.52,3423.74
TPX1: U1.C12
TPX2: U1.A11
TPX3: U1.B11
TPX4: U1.C11
UART1_CTS: 
UART1_RTS: 
UART1_RX: 
UART1_TX: 
VBUS: 
VCPU_EN: 
WL_REG_ON: 
WL_WAKE_AP: 
"": 
pads on no net: C1.1 C2.1 C23.1 C24.1 C25.1 R1.2 R2.2 R3.2 R4.2 R5.2 R6.2 U1.A1 U1.A13 U1.A17 U1.A18 U1.B14 U1.B15 U1.B16 U1.B17 U1.B18 U1.B19 U1.C14 U1.C15 U1.C16 U1.C17 U1.C18 U1.C19 U1.C20 U1.D10 U1.D12 U1.D13 U1.D15 U1.D16 U1.D17 U1.D18 U1.D19 U1.D20 U1.E12 U1.E13 U1.E15 U1.E16 U1.E17 U1.F1 U1.F2 U1.F4 U1.F5 U1.F13 U1.F15 U1.F16 U1.F17 U1.G2 U1.G3 U1.G4 U1.G5 U1.G6 U1.G7 U1.G8 U1.G9 U1.G13 U1.G14 U1.G15 U1.G16 U1.G17 U1.H3 U1.H7 U1.H8 U1.H9 U1.H13 U1.H14 U1.J2 U1.J4 U1.J5 U1.J13 U1.J14 U1.J15 U1.J16 U1.J17 U1.K4 U1.K5 U1.K15 U1.K16 U1.K17 U1.L7 U1.M2 U1.M4 U1.M6 U1.M7 U1.M15 U1.M16 U1.M18 U1.M19 U1.N1 U1.N2 U1.N3 U1.N4 U1.N5 U1.N6 U1.N7 U1.N16 U1.N17 U1.N19 U1.N20 U1.P2 U1.P3 U1.P18 U1.P19 U1.R1 U1.R2 U1.R3 U1.R4 U1.R5 U1.R16 U1.R17 U1.R19 U1.R20 U1.T2 U1.T3 U1.T16 U1.T17 U1.T18 U1.T19 U1.U1 U1.U2 U1.U3 U1.U18 U1.U19 U1.U20 U1.V1 U1.V18 U1.V19 U1.V20 U1.W18 U1.W19 U1.Y18 U2.A1